# Altium PCB led_7seg_big.PcbDoc (part 1 of 2)
Units mm, origin at the board's own origin, x right, y up, seen from the top; angles counter-clockwise.
Board outline 221 x 297 mm, 2 copper layers (Top Layer, Bottom Layer); 205 components, 177 nets, 962 pads, 294 vias.
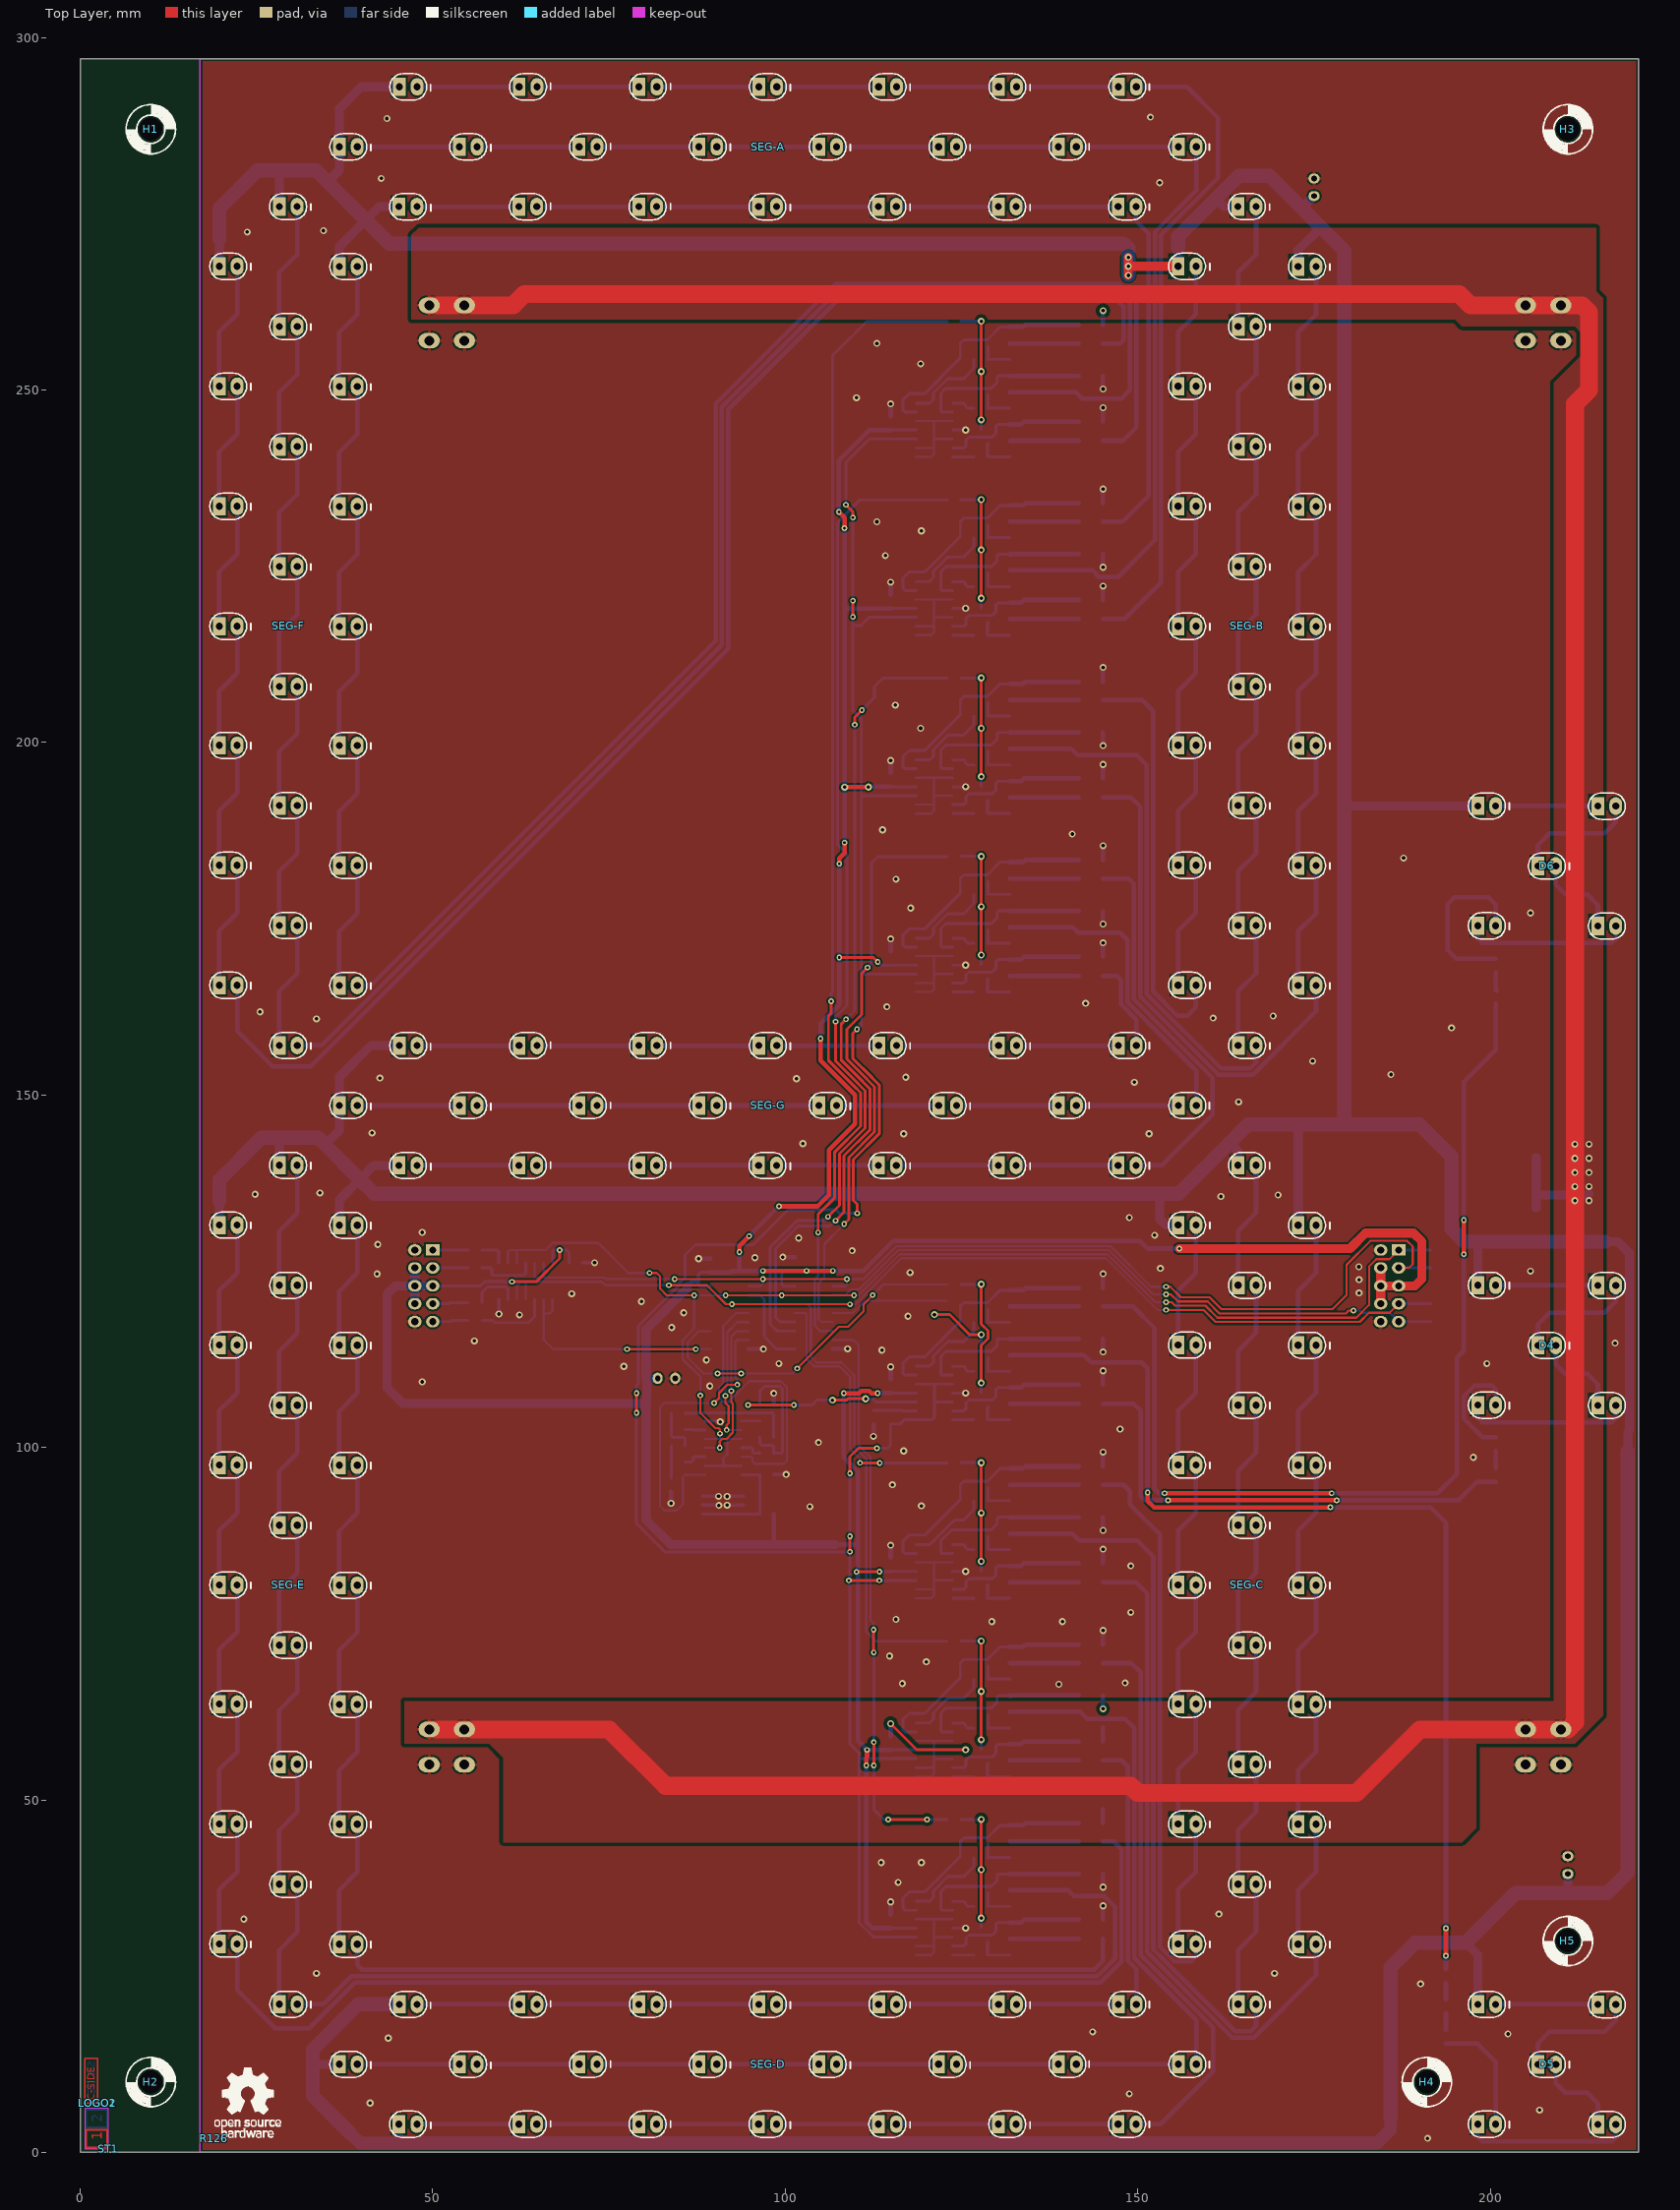
[diagram p0: Top Layer view]
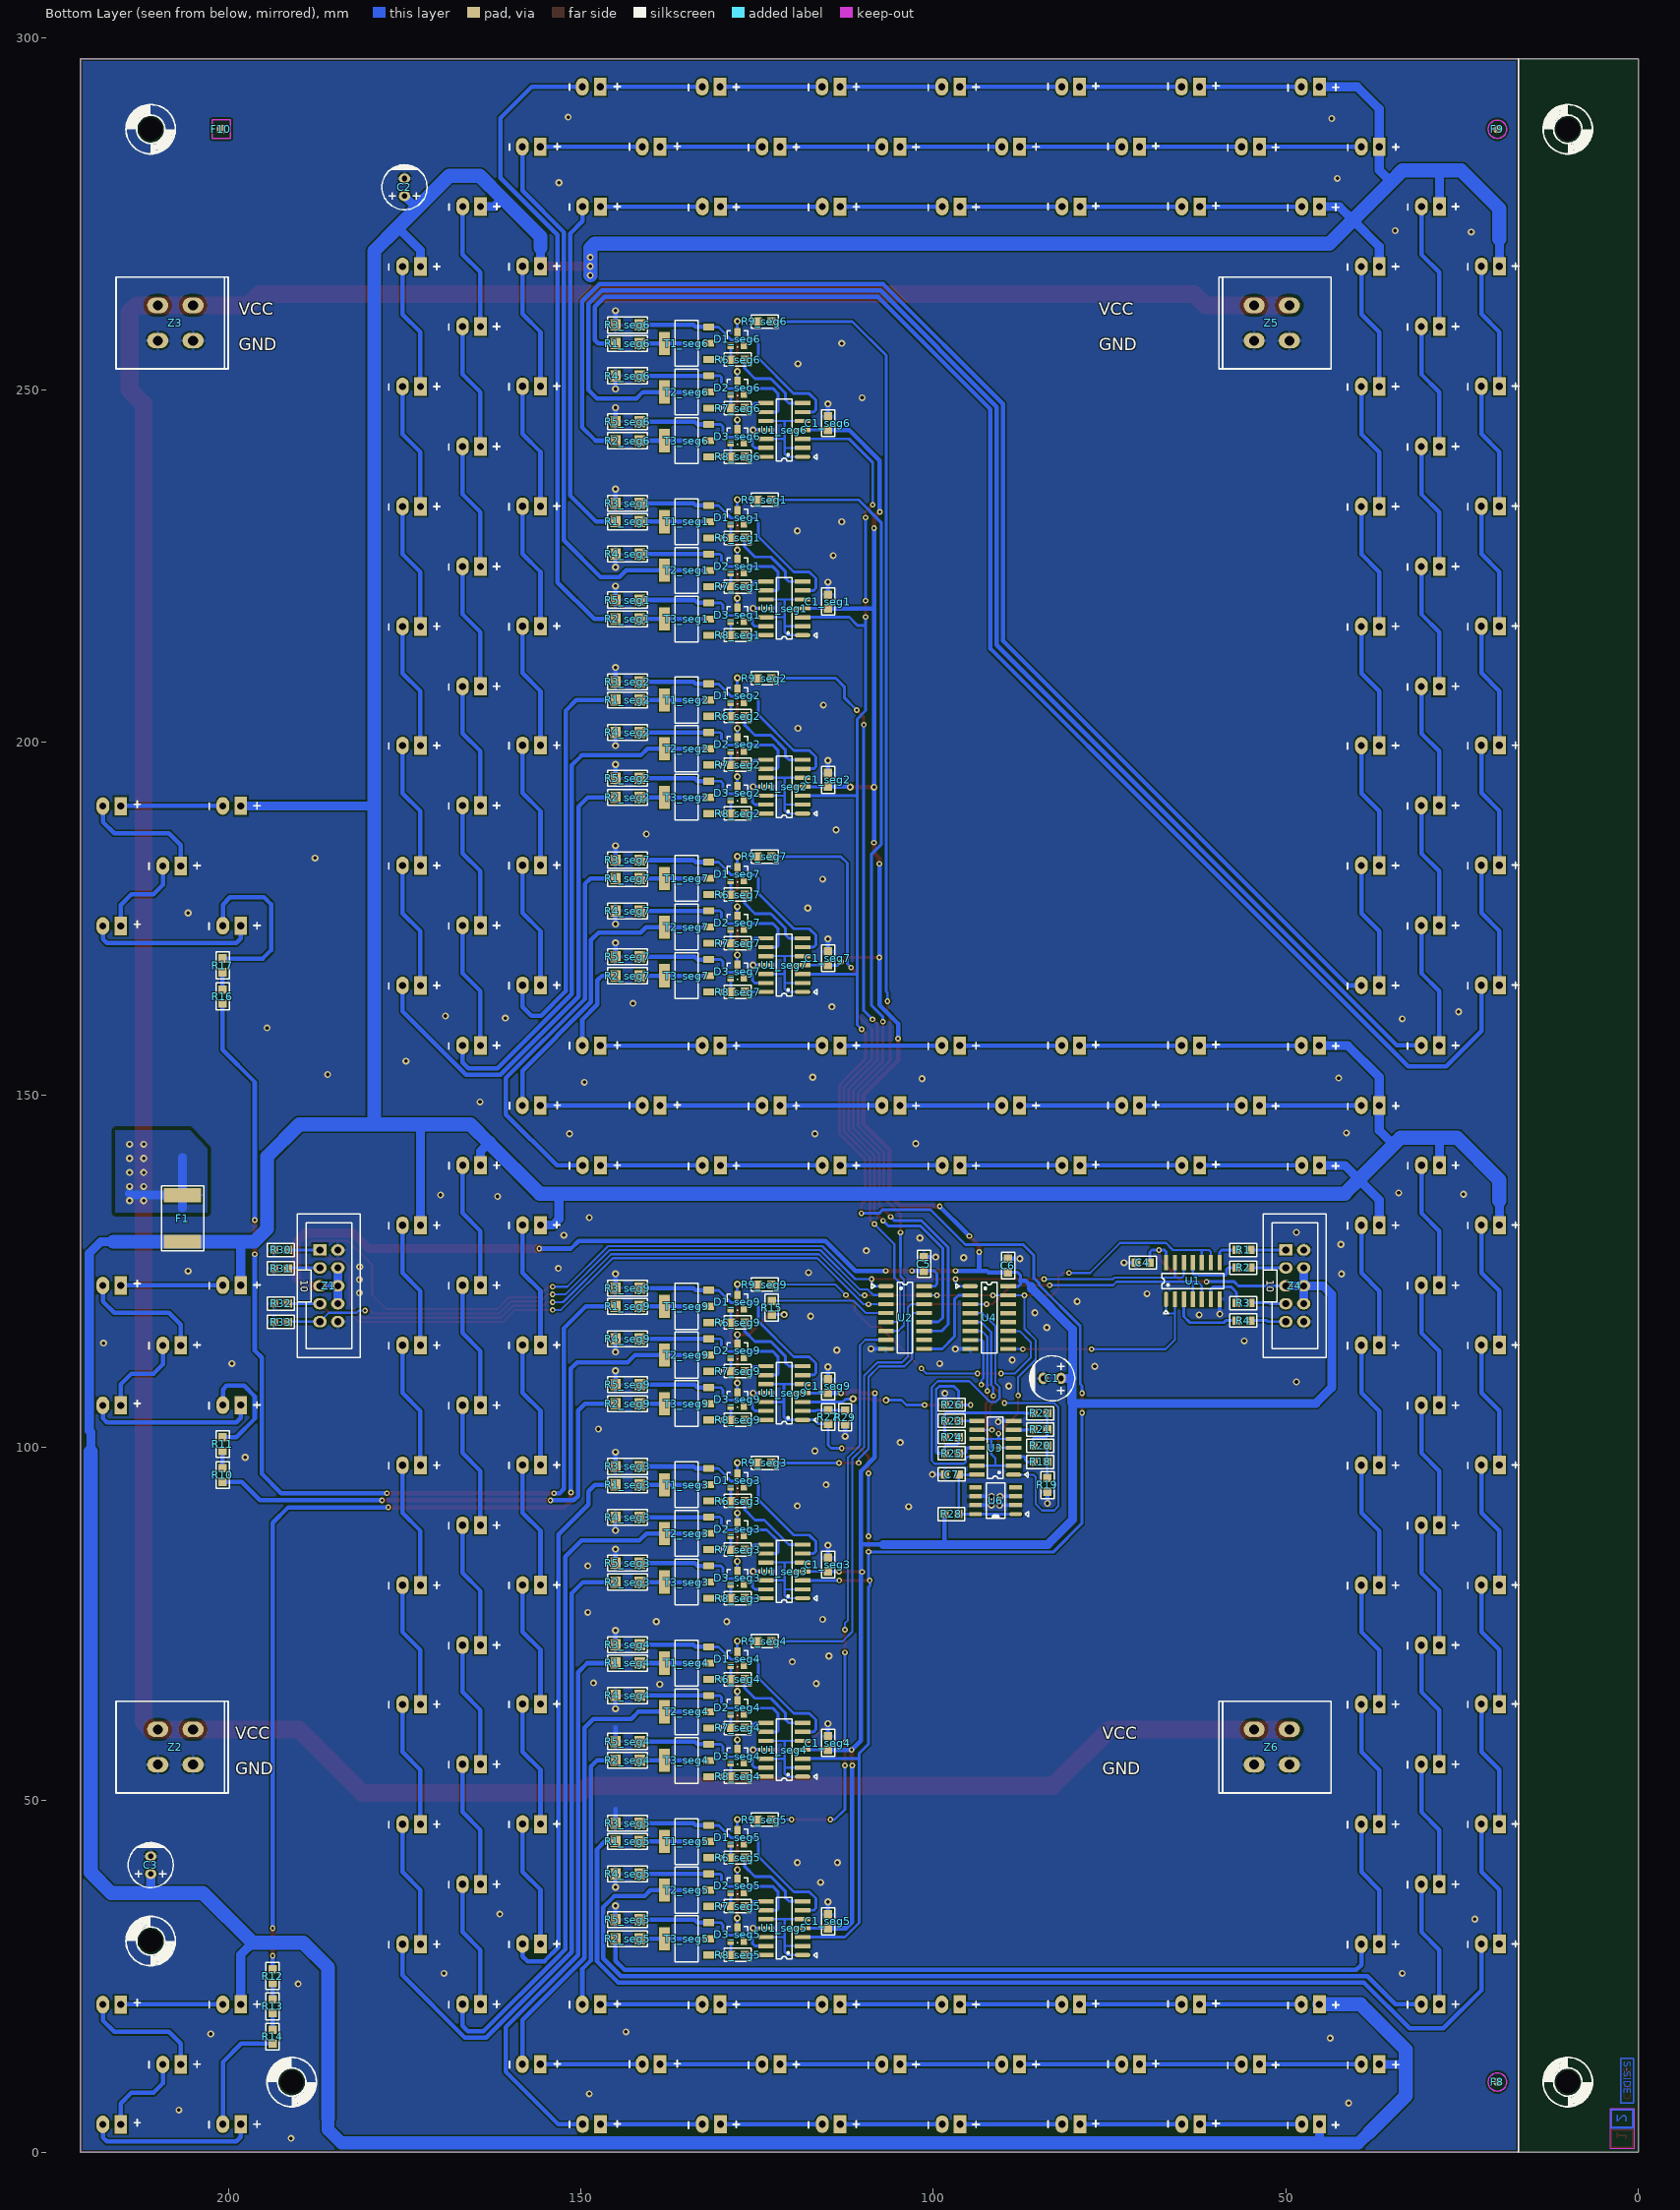
[diagram p1: Bottom Layer view, seen from below]

## Layer stack, top to bottom
Top Solder: solder mask 0.0102, Solder Resist, Dk 3.5
Top Layer: signal copper 0.0356
Dielectric1: dielectric 0.32, FR-4, Dk 4.8
Bottom Layer: signal copper 0.0356
Bottom Solder: solder mask 0.0102, Solder Resist, Dk 3.5

## Board outline
0,0 0,297 221,297 221,0

## Design rules (kind name [scope] priority, off if disabled: settings)
Clearance Clearance_ST1 [InComponent('ST1') vs InComponent('ST1')] p1: gap=0 ignorepadtopadclearanceinfootprint=FALSE
Clearance Clearance_1 [InNet('VLED')] p2: gap=0.5 ignorepadtopadclearanceinfootprint=FALSE except(0: Arc-Hole Track-Hole SMDPad-Hole THPad-Hole Via-Hole Fill-Hole Poly-Hole Region-Hole Text-Hole)
Clearance [All] p3: gap=0.254 ignorepadtopadclearanceinfootprint=FALSE except(0: Arc-Hole Track-Hole SMDPad-Hole THPad-Hole Via-Hole Fill-Hole Poly-Hole Region-Hole Text-Hole)
FabricationTestPointUsage TestPointUsage [All] p1: valid=0 allowmultiple=FALSE
FabricationTestpoint Testpoint [All] p1: side=3 testpointundercomponent=TRUE minsize=1.016 maxsize=2.54 preferedsize=1.524 minholesize=0 maxholesize=1.016 preferedholesize=0.813 testpointgrid=0.025 allowsidetop=TRUE allowsidebottom=TRUE usegrid=TRUE gridtolerance=0
HoleSize [All] p1: absolutevalues=TRUE maxlimit=5 minlimit=0.3 maxpercent=80.000 minpercent=20.000
MinimumAnnularRing [All] p1: minimumring=0.004
MinimumSolderMaskSliver [All] p1: minsoldermaskwidth=0.1
PlaneConnect [All] p1: planeconnectstyle=Relief reliefexpansion=0.508 reliefentries=4 reliefconductorwidth=0.305 reliefairgap=0.254
PolygonConnect [(InPadClass('All Pads'))] p1: connectstyle=Relief reliefconductorwidth=0.508 reliefentries=4 polygonreliefangle="90 Angle" airgapwidth=0.254
PolygonConnect PolygonConnect1 [All] p2: connectstyle=Direct reliefconductorwidth=0.406 reliefentries=4 polygonreliefangle="90 Angle" airgapwidth=0.254
RoomDefinition seg9 [InComponentClass('seg9')] p1: confinementstyle=ConfineIn formatcopy=TRUE lockcomponents=FALSE outline 146.911,125.5 113.723,125.5 113.723,100.2 146.911,100.2
RoomDefinition seg1 [InComponentClass('seg1')] p2: confinementstyle=ConfineIn formatcopy=TRUE lockcomponents=FALSE outline 146.911,236.809 113.723,236.809 113.723,211.509 146.911,211.509
RoomDefinition seg7 [InComponentClass('seg7')] p3: confinementstyle=ConfineIn formatcopy=TRUE lockcomponents=FALSE outline 146.911,186.209 113.723,186.209 113.723,160.909 146.911,160.909
RoomDefinition seg6 [InComponentClass('seg6')] p4: confinementstyle=ConfineIn formatcopy=TRUE lockcomponents=FALSE outline 146.911,262.109 113.723,262.109 113.723,236.809 146.911,236.809
RoomDefinition seg5 [InComponentClass('seg5')] p5: confinementstyle=ConfineIn formatcopy=TRUE lockcomponents=FALSE outline 146.911,49.6 113.723,49.6 113.723,24.3 146.911,24.3
RoomDefinition seg4 [InComponentClass('seg4')] p6: confinementstyle=ConfineIn formatcopy=TRUE lockcomponents=FALSE outline 146.911,74.9 113.723,74.9 113.723,49.6 146.911,49.6
RoomDefinition seg3 [InComponentClass('seg3')] p7: confinementstyle=ConfineIn formatcopy=TRUE lockcomponents=FALSE outline 146.911,100.2 113.723,100.2 113.723,74.9 146.911,74.9
RoomDefinition seg2 [InComponentClass('seg2')] p8: confinementstyle=ConfineIn formatcopy=TRUE lockcomponents=FALSE outline 146.911,211.509 113.723,211.509 113.723,186.209 146.911,186.209
RoutingVias [All] p1: holewidth=0.5 width=1 viastyle="Through Hole" minholewidth=0.4 minwidth=0.8 maxholewidth=2 maxwidth=2
SilkToSolderMaskClearance SilkscreenOverComponentPads [IsPad] p1: minsilkscreentomaskgap=0.254 clearancetoexposedcopper=TRUE
SolderMaskExpansion SolderMaskExpansion_VIA [(IsVia)] p1: expansion=-10
SolderMaskExpansion [All] p2: expansion=0.05
Width [All] p1: maxlimit=2.54 minlimit=0.203 preferedwidth=0.254 minimp=50.000000 maximp=50.000000 favimp=50.000000
24 further rules are at their usual default settings.

## Classes and differential pairs
net class EN_SEG_DP[1..2]: EN_SEG_DP1 EN_SEG_DP2
net class EN_SEG_[1..7]: EN_SEG_1 EN_SEG_2 EN_SEG_3 EN_SEG_4 EN_SEG_5 EN_SEG_6 EN_SEG_7
net class DIM[0..3]: DIM0 DIM1 DIM2 DIM3
component class seg7: C1_seg7 D1_seg7 D2_seg7 D3_seg7 R1_seg7 R2_seg7 R3_seg7 R4_seg7 R5_seg7 R6_seg7 R7_seg7 R8_seg7 R9_seg7 T1_seg7 T2_seg7 T3_seg7 U1_seg7
component class seg1: C1_seg1 D1_seg1 D2_seg1 D3_seg1 R1_seg1 R2_seg1 R3_seg1 R4_seg1 R5_seg1 R6_seg1 R7_seg1 R8_seg1 R9_seg1 T1_seg1 T2_seg1 T3_seg1 U1_seg1
component class seg9: C1_seg9 D1_seg9 D2_seg9 D3_seg9 R1_seg9 R2_seg9 R3_seg9 R4_seg9 R5_seg9 R6_seg9 R7_seg9 R8_seg9 R9_seg9 T1_seg9 T2_seg9 T3_seg9 U1_seg9
channel class Row: Row1 Row2 Row3 Row4 Row5 Row6 Row7 Row8
component class seg2: C1_seg2 D1_seg2 D2_seg2 D3_seg2 R1_seg2 R2_seg2 R3_seg2 R4_seg2 R5_seg2 R6_seg2 R7_seg2 R8_seg2 R9_seg2 T1_seg2 T2_seg2 T3_seg2 U1_seg2
component class seg3: C1_seg3 D1_seg3 D2_seg3 D3_seg3 R1_seg3 R2_seg3 R3_seg3 R4_seg3 R5_seg3 R6_seg3 R7_seg3 R8_seg3 R9_seg3 T1_seg3 T2_seg3 T3_seg3 U1_seg3
component class seg4: C1_seg4 D1_seg4 D2_seg4 D3_seg4 R1_seg4 R2_seg4 R3_seg4 R4_seg4 R5_seg4 R6_seg4 R7_seg4 R8_seg4 R9_seg4 T1_seg4 T2_seg4 T3_seg4 U1_seg4
component class seg5: C1_seg5 D1_seg5 D2_seg5 D3_seg5 R1_seg5 R2_seg5 R3_seg5 R4_seg5 R5_seg5 R6_seg5 R7_seg5 R8_seg5 R9_seg5 T1_seg5 T2_seg5 T3_seg5 U1_seg5
component class seg6: C1_seg6 D1_seg6 D2_seg6 D3_seg6 R1_seg6 R2_seg6 R3_seg6 R4_seg6 R5_seg6 R6_seg6 R7_seg6 R8_seg6 R9_seg6 T1_seg6 T2_seg6 T3_seg6 U1_seg6

## Components (designator, comment, footprint, x,y, rotation, side; value= is the part's Value field where it differs from the comment)
C1 "47u/35V" CAP_V_6.3X11 84.4,109.8 r180 bottom
C1_seg1 "100n/50V" 0805 114.947,219.009 r90 bottom (schematic designator C1)
C1_seg2 "100n/50V" 0805 114.947,193.709 r90 bottom (schematic designator C1)
C1_seg3 "100n/50V" 0805 114.947,82.4 r90 bottom (schematic designator C1)
C1_seg4 "100n/50V" 0805 114.947,57.1 r90 bottom (schematic designator C1)
C1_seg5 "100n/50V" 0805 114.947,31.8 r90 bottom (schematic designator C1)
C1_seg6 "100n/50V" 0805 114.947,244.309 r90 bottom (schematic designator C1)
C1_seg7 "100n/50V" 0805 114.947,168.409 r90 bottom (schematic designator C1)
C1_seg9 "100n/50V" 0805 114.947,107.7 r90 bottom (schematic designator C1)
C2 "47u/35V" CAP_V_6.3X11 175,280 r270 bottom
C3 "47u/35V" CAP_V_6.3X11 211,42 r270 bottom
C4 "100n/50V" 0805 69.3,126.2 r0 bottom
C5 "100n/50V" 0805 101.351,125.043 r90 bottom
C6 "100n/50V" 0805 89.401,124.826 r90 bottom
C7 "100n/50V" 0805 96.409,96.145 r0 bottom
D1_seg1 "BAR43" SOT-23 128.747,230.909 r270 bottom (schematic designator D1)
D1_seg2 "BAR43" SOT-23 128.747,205.609 r270 bottom (schematic designator D1)
D1_seg3 "BAR43" SOT-23 128.747,94.3 r270 bottom (schematic designator D1)
D1_seg4 "BAR43" SOT-23 128.747,69 r270 bottom (schematic designator D1)
D1_seg5 "BAR43" SOT-23 128.747,43.7 r270 bottom (schematic designator D1)
D1_seg6 "BAR43" SOT-23 128.747,256.209 r270 bottom (schematic designator D1)
D1_seg7 "BAR43" SOT-23 128.747,180.309 r270 bottom (schematic designator D1)
D1_seg9 "BAR43" SOT-23 128.747,119.6 r270 bottom (schematic designator D1)
D2_seg1 "BAR43" SOT-23 128.747,224.009 r270 bottom (schematic designator D2)
D2_seg2 "BAR43" SOT-23 128.747,198.709 r270 bottom (schematic designator D2)
D2_seg3 "BAR43" SOT-23 128.747,87.4 r270 bottom (schematic designator D2)
D2_seg4 "BAR43" SOT-23 128.747,62.1 r270 bottom (schematic designator D2)
D2_seg5 "BAR43" SOT-23 128.747,36.8 r270 bottom (schematic designator D2)
D2_seg6 "BAR43" SOT-23 128.747,249.309 r270 bottom (schematic designator D2)
D2_seg7 "BAR43" SOT-23 128.747,173.409 r270 bottom (schematic designator D2)
D2_seg9 "BAR43" SOT-23 128.747,112.7 r270 bottom (schematic designator D2)
D3_seg1 "BAR43" SOT-23 128.747,217.109 r270 bottom (schematic designator D3)
D3_seg2 "BAR43" SOT-23 128.747,191.809 r270 bottom (schematic designator D3)
D3_seg3 "BAR43" SOT-23 128.747,80.5 r270 bottom (schematic designator D3)
D3_seg4 "BAR43" SOT-23 128.747,55.2 r270 bottom (schematic designator D3)
D3_seg5 "BAR43" SOT-23 128.747,29.9 r270 bottom (schematic designator D3)
D3_seg6 "BAR43" SOT-23 128.747,242.409 r270 bottom (schematic designator D3)
D3_seg7 "BAR43" SOT-23 128.747,166.509 r270 bottom (schematic designator D3)
D3_seg9 "BAR43" SOT-23 128.747,105.8 r270 bottom (schematic designator D3)
D4 "SEGMENT_5LED" SEGMENT_5LED_V 197,103.5 r0 top locked
D5 "SEGMENT_5LED" SEGMENT_5LED_V 197,1.5 r0 top locked
D6 "SEGMENT_5LED" SEGMENT_5LED_V 197,171.5 r0 top locked
F1 "SL050-60" 2920 206.5,129.184 r90 bottom
F8 "FID-S-RD-1.2-3.0" FID-S-RD-1.2-3.0 20,10 r270 bottom
F9 "FID-S-RD-1.2-3.0" FID-S-RD-1.2-3.0 20,287 r270 bottom
F10 "FID-S-RC-1.2-3.0" FID-S-RC-1.2-3.0 201,287 r270 bottom
H1 "MH_3.3-2L" MH_3.3-2L 10,287 r0 top locked
H2 "MH_3.3-2L" MH_3.3-2L 10,10 r0 top locked
H3 "MH_3.3-2L" MH_3.3-2L 211,287 r0 top locked
H4 "MH_3.3-2L" MH_3.3-2L 191,10 r0 top locked
H5 "MH_3.3-2L" MH_3.3-2L 211,30 r0 top locked
LOGO1 "C-SIDE" COMPONENT_SIDE 2.5,7 r90 top
LOGO2 "S-SIDE" SOLDER_SIDE 2.5,7 r90 top
R1 "100R" 0805 57,128 r180 bottom
R1_seg1 "100R" 1206 141.647,231.309 r0 bottom (schematic designator R1)
R1_seg2 "100R" 1206 141.647,206.009 r0 bottom (schematic designator R1)
R1_seg3 "100R" 1206 141.647,94.7 r0 bottom (schematic designator R1)
R1_seg4 "100R" 1206 141.647,69.4 r0 bottom (schematic designator R1)
R1_seg5 "100R" 1206 141.647,44.1 r0 bottom (schematic designator R1)
R1_seg6 "100R" 1206 141.647,256.609 r0 bottom (schematic designator R1)
R1_seg7 "100R" 1206 141.647,180.709 r0 bottom (schematic designator R1)
R1_seg9 "100R" 1206 141.647,120 r0 bottom (schematic designator R1)
R2 "100R" 0805 57,125.5 r180 bottom
R2_seg1 "100R" 1206 141.647,217.509 r0 bottom (schematic designator R2)
R2_seg2 "100R" 1206 141.647,192.209 r0 bottom (schematic designator R2)
R2_seg3 "100R" 1206 141.647,80.9 r0 bottom (schematic designator R2)
R2_seg4 "100R" 1206 141.647,55.6 r0 bottom (schematic designator R2)
R2_seg5 "100R" 1206 141.647,30.3 r0 bottom (schematic designator R2)
R2_seg6 "100R" 1206 141.647,242.809 r0 bottom (schematic designator R2)
R2_seg7 "100R" 1206 141.647,166.909 r0 bottom (schematic designator R2)
R2_seg9 "100R" 1206 141.647,106.2 r0 bottom (schematic designator R2)
R3 "100R" 0805 57,120.5 r180 bottom
R3_seg1 "100R" 1206 141.647,233.909 r0 bottom (schematic designator R3)
R3_seg2 "100R" 1206 141.647,208.609 r0 bottom (schematic designator R3)
R3_seg3 "100R" 1206 141.647,97.3 r0 bottom (schematic designator R3)
R3_seg4 "100R" 1206 141.647,72 r0 bottom (schematic designator R3)
R3_seg5 "100R" 1206 141.647,46.7 r0 bottom (schematic designator R3)
R3_seg6 "100R" 1206 141.647,259.209 r0 bottom (schematic designator R3)
R3_seg7 "100R" 1206 141.647,183.309 r0 bottom (schematic designator R3)
R3_seg9 "100R" 1206 141.647,122.6 r0 bottom (schematic designator R3)
R4 "100R" 0805 57,118 r180 bottom
R4_seg1 "100R" 1206 141.647,226.709 r0 bottom (schematic designator R4)
R4_seg2 "100R" 1206 141.647,201.409 r0 bottom (schematic designator R4)
R4_seg3 "100R" 1206 141.647,90.1 r0 bottom (schematic designator R4)
R4_seg4 "100R" 1206 141.647,64.8 r0 bottom (schematic designator R4)
R4_seg5 "100R" 1206 141.647,39.5 r0 bottom (schematic designator R4)
R4_seg6 "100R" 1206 141.647,252.009 r0 bottom (schematic designator R4)
R4_seg7 "100R" 1206 141.647,176.109 r0 bottom (schematic designator R4)
R4_seg9 "100R" 1206 141.647,115.4 r0 bottom (schematic designator R4)
R5_seg1 "100R" 1206 141.647,220.209 r0 bottom (schematic designator R5)
R5_seg2 "100R" 1206 141.647,194.909 r0 bottom (schematic designator R5)
R5_seg3 "100R" 1206 141.647,83.6 r0 bottom (schematic designator R5)
R5_seg4 "100R" 1206 141.647,58.3 r0 bottom (schematic designator R5)
R5_seg5 "100R" 1206 141.647,33 r0 bottom (schematic designator R5)
R5_seg6 "100R" 1206 141.647,245.509 r0 bottom (schematic designator R5)
R5_seg7 "100R" 1206 141.647,169.609 r0 bottom (schematic designator R5)
R5_seg9 "100R" 1206 141.647,108.9 r0 bottom (schematic designator R5)
R6_seg1 "10k" 0805 126.747,229.009 r0 bottom (schematic designator R6)
R6_seg2 "10k" 0805 126.747,203.709 r0 bottom (schematic designator R6)
R6_seg3 "10k" 0805 126.747,92.4 r0 bottom (schematic designator R6)
R6_seg4 "10k" 0805 126.747,67.1 r0 bottom (schematic designator R6)
R6_seg5 "10k" 0805 126.747,41.8 r0 bottom (schematic designator R6)
R6_seg6 "10k" 0805 126.747,254.309 r0 bottom (schematic designator R6)
R6_seg7 "10k" 0805 126.747,178.409 r0 bottom (schematic designator R6)
R6_seg9 "10k" 0805 126.747,117.7 r0 bottom (schematic designator R6)
R7_seg1 "10k" 0805 126.747,222.109 r0 bottom (schematic designator R7)
R7_seg2 "10k" 0805 126.747,196.809 r0 bottom (schematic designator R7)
R7_seg3 "10k" 0805 126.747,85.5 r0 bottom (schematic designator R7)
R7_seg4 "10k" 0805 126.747,60.2 r0 bottom (schematic designator R7)
R7_seg5 "10k" 0805 126.747,34.9 r0 bottom (schematic designator R7)
R7_seg6 "10k" 0805 126.747,247.409 r0 bottom (schematic designator R7)
R7_seg7 "10k" 0805 126.747,171.509 r0 bottom (schematic designator R7)
R7_seg9 "10k" 0805 126.747,110.8 r0 bottom (schematic designator R7)
R8_seg1 "10k" 0805 126.747,215.209 r0 bottom (schematic designator R8)
R8_seg2 "10k" 0805 126.747,189.909 r0 bottom (schematic designator R8)
R8_seg3 "10k" 0805 126.747,78.6 r0 bottom (schematic designator R8)
R8_seg4 "10k" 0805 126.747,53.3 r0 bottom (schematic designator R8)
R8_seg5 "10k" 0805 126.747,28 r0 bottom (schematic designator R8)
R8_seg6 "10k" 0805 126.747,240.509 r0 bottom (schematic designator R8)
R8_seg7 "10k" 0805 126.747,164.609 r0 bottom (schematic designator R8)
R8_seg9 "10k" 0805 126.747,103.9 r0 bottom (schematic designator R8)
R9_seg1 "1k" 0805 122.947,234.409 r0 bottom (schematic designator R9)
R9_seg2 "1k" 0805 122.947,209.109 r0 bottom (schematic designator R9)
R9_seg3 "1k" 0805 122.947,97.8 r0 bottom (schematic designator R9)
R9_seg4 "1k" 0805 122.947,72.5 r0 bottom (schematic designator R9)
R9_seg5 "1k" 0805 122.947,47.2 r0 bottom (schematic designator R9)
R9_seg6 "1k" 0805 122.947,259.709 r0 bottom (schematic designator R9)
R9_seg7 "1k" 0805 122.947,183.809 r0 bottom (schematic designator R9)
R9_seg9 "1k" 0805 122.947,123.1 r0 bottom (schematic designator R9)
R10 "100R" 0805 200.8,95.1 r90 bottom
R11 "100R" 0805 200.8,99.5 r90 bottom
R12 "100R" 0805 193.7,26 r270 bottom
R13 "100R" 0805 193.7,21.7 r270 bottom
R14 "100R" 0805 193.7,17.4 r270 bottom
R15 "1k" 0805 122.917,120.786 r270 bottom
R16 "100R" 0805 200.8,163 r90 bottom
R17 "100R" 0805 200.8,167.4 r90 bottom
R18 "2k" 0805 85.809,97.945 r180 bottom
R19 "2k" 0805 83.809,95.645 r270 bottom
R20 "1k" 0805 85.809,100.245 r180 bottom
R21 "2k" 0805 85.809,102.545 r180 bottom
R22 "1k" 0805 85.809,104.845 r180 bottom
R23 "2k" 0805 96.409,103.745 r0 bottom
R24 "1k" 0805 96.409,101.445 r0 bottom
R25 "2k" 0805 96.409,99.145 r0 bottom
R26 "2k" 0805 96.409,106.045 r0 bottom
R27 "1k" 0805 114.917,105.286 r270 bottom
R28 "1k" 0805 98.409,90.545 r180 bottom
R29 "10k" 0805 112.517,103.286 r90 bottom
R30 "1k" 0805 193.5,128 r180 bottom
R31 "1k" 0805 193.5,125.4 r180 bottom
R32 "1k" 0805 193.5,120.4 r180 bottom
R33 "1k" 0805 193.5,117.8 r180 bottom
R126 "Comment" PCB_OSHW_LOGO_1000 19,2 r0 top
SEG-A "SEGMENT_22LED" SEGMENT_22LED_H 35,284.5 r0 top locked
SEG-B "SEGMENT_22LED" SEGMENT_22LED_V 165.5,154 r0 top locked
SEG-C "SEGMENT_22LED" SEGMENT_22LED_V 165.5,18 r0 top locked
SEG-D "SEGMENT_22LED" SEGMENT_22LED_H 35,12.5 r0 top locked
SEG-E "SEGMENT_22LED" SEGMENT_22LED_V 29.5,18 r0 top locked
SEG-F "SEGMENT_22LED" SEGMENT_22LED_V 29.5,154 r0 top locked
SEG-G "SEGMENT_22LED" SEGMENT_22LED_H 35,148.5 r0 top locked
ST1 "STACKUP_2LAYER" STACKUP_2LAYER 4,0.5 r90 top
T1_seg1 "BCP56-16" SOT223 131.847,229.009 r180 bottom (schematic designator T1)
T1_seg2 "BCP56-16" SOT223 131.847,203.709 r180 bottom (schematic designator T1)
T1_seg3 "BCP56-16" SOT223 131.847,92.4 r180 bottom (schematic designator T1)
T1_seg4 "BCP56-16" SOT223 131.847,67.1 r180 bottom (schematic designator T1)
T1_seg5 "BCP56-16" SOT223 131.847,41.8 r180 bottom (schematic designator T1)
T1_seg6 "BCP56-16" SOT223 131.847,254.309 r180 bottom (schematic designator T1)
T1_seg7 "BCP56-16" SOT223 131.847,178.409 r180 bottom (schematic designator T1)
T1_seg9 "BCP56-16" SOT223 131.847,117.7 r180 bottom (schematic designator T1)
T2_seg1 "BCP56-16" SOT223 131.847,222.109 r180 bottom (schematic designator T2)
T2_seg2 "BCP56-16" SOT223 131.847,196.809 r180 bottom (schematic designator T2)
T2_seg3 "BCP56-16" SOT223 131.847,85.5 r180 bottom (schematic designator T2)
T2_seg4 "BCP56-16" SOT223 131.847,60.2 r180 bottom (schematic designator T2)
T2_seg5 "BCP56-16" SOT223 131.847,34.9 r180 bottom (schematic designator T2)
T2_seg6 "BCP56-16" SOT223 131.847,247.409 r180 bottom (schematic designator T2)
T2_seg7 "BCP56-16" SOT223 131.847,171.509 r180 bottom (schematic designator T2)
T2_seg9 "BCP56-16" SOT223 131.847,110.8 r180 bottom (schematic designator T2)
T3_seg1 "BCP56-16" SOT223 131.847,215.209 r180 bottom (schematic designator T3)
T3_seg2 "BCP56-16" SOT223 131.847,189.909 r180 bottom (schematic designator T3)
T3_seg3 "BCP56-16" SOT223 131.847,78.6 r180 bottom (schematic designator T3)
T3_seg4 "BCP56-16" SOT223 131.847,53.3 r180 bottom (schematic designator T3)
T3_seg5 "BCP56-16" SOT223 131.847,28 r180 bottom (schematic designator T3)
T3_seg6 "BCP56-16" SOT223 131.847,240.509 r180 bottom (schematic designator T3)
T3_seg7 "BCP56-16" SOT223 131.847,164.609 r180 bottom (schematic designator T3)
T3_seg9 "BCP56-16" SOT223 131.847,103.9 r180 bottom (schematic designator T3)
U1 "74LVC08AD" SO14 67,121 r180 bottom
U1_seg1 "LM324D" SO14 118.547,215.209 r90 bottom (schematic designator U1)
U1_seg2 "LM324D" SO14 118.547,189.909 r90 bottom (schematic designator U1)
U1_seg3 "LM324D" SO14 118.547,78.6 r90 bottom (schematic designator U1)
U1_seg4 "LM324D" SO14 118.547,53.3 r90 bottom (schematic designator U1)
U1_seg5 "LM324D" SO14 118.547,28 r90 bottom (schematic designator U1)
U1_seg6 "LM324D" SO14 118.547,240.509 r90 bottom (schematic designator U1)
U1_seg7 "LM324D" SO14 118.547,164.609 r90 bottom (schematic designator U1)
U1_seg9 "LM324D" SO14 118.547,103.9 r90 bottom (schematic designator U1)
U2 "74HC4094-SMD" SO16N 106.72,122.87 r270 bottom
U3 "74LVC08AD" SO14 88.611,96.132 r90 bottom
U4 "74HC4094-SMD" SO16N 94.771,122.854 r270 bottom
U6 "TL431CD" SO8 88.309,90.545 r90 bottom
Z1 "AWP-10P" BH10S 187,128 r270 bottom
Z2 "DG390-5.0-02P-12-00A(H)" WAGO2X2-5 210,60 r270 bottom
Z3 "DG390-5.0-02P-12-00A(H)" WAGO2X2-5 210,262 r270 bottom
Z4 "AWP-10P" BH10S 50,128 r270 bottom
Z5 "DG390-5.0-02P-12-00A(H)" WAGO2X2-5 49.5,257 r90 bottom
Z6 "DG390-5.0-02P-12-00A(H)" WAGO2X2-5 49.5,55 r90 bottom

## Footprints (in the part's own frame and the unit in brackets; to place one, negate y for a bottom-side part, rotate by r counter-clockwise, add the part's x,y. Pads: shape width x height; smd on the part's side, far side on the other; paste and mask are expansions set on the pad)
0805 [mm]
  rect 1.2x1.2 smd: 1(0,0) 2(1.95,0)
  silkscreen extent -0.93,-0.95 2.89,0.93
1206 [mm]
  rect 1.52x1.6 smd: 1(0,0) 2(3.43,0)
  silkscreen extent -1.09,-1.13 4.52,1.13
2920 [mm]
  rect 2x5.3 smd: 1(0,0) 2(6.6,0)
  silkscreen extent -1.3,-3 7.9,3
BH10S [mm]
  rect 1.6x1.9 hole 1: 1(0,0)
  oval 1.6x1.9 hole 1: 2(0,2.54) 3(2.54,0) 4(2.54,2.54) 5(5.08,0) 6(5.08,2.54) 7(7.62,0) 8(7.62,2.54) 9(10.16,0) 10(10.16,2.54)
  silkscreen extent -5.09,-3.19 15.26,5.72
CAP_V_6.3X11 [mm]
  oval 1.4x1.6 hole 0.8: 1(0,0) 2(2.5,0)
  silkscreen extent -1.95,-3.2 4.45,3.2
COMPONENT_SIDE [mm]
  Top Layer lines w0.203: 0,1.829 6.325,1.829 6.325,0 0,0 0,1.829
FID-S-RC-1.2-3.0 [mm]
  rect 1.2x1.2 smd paste-10 mask+0: 0(0,0)
  Top Layer keep-out lines w0.2: 1.3,1.3 1.3,-1.3 -1.3,-1.3 -1.3,1.3 1.3,1.3
FID-S-RD-1.2-3.0 [mm]
  round 1.2 smd paste-10 mask+0: 0(0,0)
  Top Layer keep-out lines w0.2: 0.016,1.3 ccw(c0.016,0) 0.016,-1.3 ccw(c0.016,0) 0.016,1.3
MH_3.3-2L [mm]
  round 0 hole 3.3 unplated: 0(0,0)
  silkscreen extent -3.49,-3.52 3.51,3.48
PCB_OSHW_LOGO_1000 [mm]
  silkscreen extent 0.04,0.08 9.48,10
SEGMENT_5LED_V [mm]
  rect 1.8x2.6 hole 1: A1(1.23,19.5) ""(1.23,2.5) ""(9.746,10.976) ""(18.255,2.467) ""(18.255,19.467)
  oval 1.8x2.5 hole 1: K1(3.77,2.5) ""(3.77,19.5) ""(12.286,10.976) ""(20.795,2.467) ""(20.795,19.467)
  Bottom Layer lines w0.635: 1.23,2.5 1.23,0.67 1.857,0.043 20.209,0.043 20.795,0.629 20.795,2.467 ; 3.77,19.5 18.255,19.5 ; 9.746,10.976 9.746,13.946 11.4,15.6 19.184,15.6 20.795,17.211 20.795,19.467 ; 12.286,10.976 12.286,8.266 13.609,6.943 16.757,6.943 18.255,5.445 18.255,2.467
  silkscreen extent -0.11,0.6 22.13,21.35, body extent 0.4,0.87 21.63,21.1, height 7.3
SEGMENT_22LED_H [mm]
  rect 1.8x2.6 hole 1: A(18.75,0) A(27.21,-8.5) A(27.25,8.5) A(35.75,0) A(44.21,-8.5) A(44.25,8.5) A(52.75,0) A(61.21,-8.5) A(61.25,8.5) A(69.75,0) A(78.21,-8.5) A(78.25,8.5) A(86.75,0) A(95.21,-8.5) A(95.25,8.5) A(103.75,0) A(112.21,-8.5) A(112.25,8.5) A(120.75,0) A1(10.21,-8.5) A2(1.75,0) A3(10.25,8.5)
  oval 1.8x2.5 hole 1: K(4.29,0) K(12.75,-8.5) K(12.79,8.5) K(21.29,0) K(29.75,-8.5) K(29.79,8.5) K(38.29,0) K(46.75,-8.5) K(46.79,8.5) K(55.29,0) K(63.75,-8.5) K(63.79,8.5) K(72.29,0) K(80.75,-8.5) K(80.79,8.5) K(89.29,0) K(97.75,-8.5) K(97.79,8.5) K(106.29,0) K1(114.79,8.5) K2(123.29,0) K3(114.75,-8.5)
  Bottom Layer lines w0.635: 4.29,0 18.75,0 ; 12.75,-8.5 27.21,-8.5 ; 12.79,8.5 27.25,8.5 ; 21.29,0 35.75,0 ; 29.75,-8.5 44.21,-8.5 ; 29.79,8.5 44.25,8.5 ; 38.29,0 52.75,0 ; 46.75,-8.5 61.21,-8.5 ; 46.79,8.5 61.25,8.5 ; 55.29,0 69.75,0 ; 63.75,-8.5 78.21,-8.5 ; 63.79,8.5 78.25,8.5 ; 72.29,0 86.75,0 ; 80.75,-8.5 95.21,-8.5 ; 80.79,8.5 95.25,8.5 ; 89.29,0 103.75,0 ; 97.75,-8.5 112.21,-8.5 ; 97.79,8.5 112.25,8.5 ; 106.29,0 120.75,0
  silkscreen extent 0.41,-10.37 125.13,10.35, body extent 0.92,-10.11 124.14,10.11, height 7.3
SEGMENT_22LED_V [mm]
  rect 1.8x2.6 hole 1: A(-9.779,11.557) A(-9.779,28.575) A(-9.779,45.593) A(-9.779,62.484) A(-9.779,79.502) A(-9.779,96.52) A(-1.263,3.015) A(-1.263,20.033) A(-1.263,37.051) A(-1.263,53.942) A(-1.263,70.96) A(-1.263,87.978) A(-1.263,104.996) A(7.246,11.524) A(7.246,28.542) A(7.246,45.56) A(7.246,62.451) A(7.246,79.469) A(7.246,96.487) A1(-9.779,113.538) A2(-1.282,122.014) A3(7.246,113.505)
  oval 1.8x2.5 hole 1: K(-7.239,28.575) K(-7.239,45.593) K(-7.239,62.484) K(-7.239,79.502) K(-7.239,96.52) K(-7.239,113.538) K(1.258,122.014) K(1.277,20.033) K(1.277,37.051) K(1.277,53.942) K(1.277,70.96) K(1.277,87.978) K(1.277,104.996) K(9.786,28.542) K(9.786,45.56) K(9.786,62.451) K(9.786,79.469) K(9.786,96.487) K(9.786,113.505) K1(-7.239,11.557) K2(1.277,3.015) K3(9.786,11.524)
  Bottom Layer lines w0.635: -9.779,11.557 -9.779,19.258 -7.239,21.798 -7.239,28.575 ; -9.779,28.575 -9.779,36.276 -7.239,38.816 -7.239,45.593 ; -9.779,45.593 -9.779,53.294 -7.239,55.834 -7.239,62.611 ; -9.779,62.484 -9.779,70.185 -7.239,72.725 -7.239,79.502 ; -9.779,79.502 -9.779,87.203 -7.239,89.743 -7.239,96.52 ; -9.779,96.52 -9.779,104.221 -7.239,106.761 -7.239,113.538 ; -1.263,3.015 -1.263,10.716 1.277,13.256 1.277,20.033 ; -1.263,20.033 -1.263,27.734 1.277,30.274 1.277,37.051 ; -1.263,37.051 -1.263,44.752 1.277,47.292 1.277,54.069 ; -1.263,53.942 -1.263,61.643 1.277,64.183 1.277,70.96 ; -1.263,70.96 -1.263,78.661 1.277,81.201 1.277,87.978 ; -1.263,87.978 -1.263,95.679 1.277,98.219 1.277,104.996 ; -1.263,104.996 -1.263,112.697 1.277,115.237 1.277,122.014 ; 7.246,11.524 7.246,19.225 9.786,21.765 9.786,28.542 ; 7.246,28.542 7.246,36.243 9.786,38.783 9.786,45.56 ; 7.246,45.56 7.246,53.261 9.786,55.801 9.786,62.578 ; 7.246,62.451 7.246,70.152 9.786,72.692 9.786,79.469 ; 7.246,79.469 7.246,87.17 9.786,89.71 9.786,96.487 ; 7.246,96.487 7.246,104.188 9.786,106.728 9.786,113.505
  silkscreen extent -11.12,1.14 11.73,123.86, body extent -10.63,1.42 10.62,123.61, height 7.3
SO8 [mm]
  oval 0.6x1.8 smd: 1(0,0)
  rect 0.6x1.8 smd: 2(1.27,0) 3(2.54,0) 4(3.81,0) 5(3.81,5.715) 6(2.54,5.715) 7(1.27,5.715) 8(0,5.715)
  silkscreen extent -0.6,-1.85 4.4,4.19
SO14 [mm]
  oval 0.6x2.2 smd: 1(0,0)
  rect 0.6x2.2 smd: 2(1.27,0) 3(2.54,0) 4(3.81,0) 5(5.08,0) 6(6.35,0) 7(7.62,0) 8(7.62,5.2) 9(6.35,5.2) 10(5.08,5.2) 11(3.81,5.2) 12(2.54,5.2) 13(1.27,5.2) 14(0,5.2)
  silkscreen extent -0.56,-2.07 8.18,3.7
SO16N [mm]
  oval 0.6x2.2 smd: 1(0,0)
  rect 0.6x2.2 smd: 2(1.27,0) 3(2.54,0) 4(3.81,0) 5(5.08,0) 6(6.35,0) 7(7.62,0) 8(8.89,0) 9(8.89,5.4) 10(7.62,5.4) 11(6.35,5.4) 12(5.08,5.4) 13(3.81,5.4) 14(2.54,5.4) 15(1.27,5.4) 16(0,5.4)
  silkscreen extent -0.57,-2.07 9.5,3.8
SOLDER_SIDE [mm]
  Bottom Layer lines w0.203: 0,1.829 6.325,1.829 6.325,0 0,0 0,1.829
SOT223 [mm]
  rect 1.5x1 smd: 1(0,0) 2(0,2.3) 3(0,4.6)
  rect 1.5x3.3 smd: 2(-6.3,2.3)
  silkscreen extent -4.8,-0.95 1.77,5.55
SOT-23 [mm]
  rect 0.9x0.9 smd: 1(0,0) 2(0,1.9)
  rect 1.2x0.9 smd: 3(-2,0.95)
  silkscreen extent -2.16,-0.51 0.13,2.41
STACKUP_2LAYER [mm]
  Top Layer lines w0.305: 0.165,3.208 0.165,0.16 2.705,0.16 2.705,3.208 0.165,3.208
  Bottom Layer lines w0.305: 3.016,3.203 5.556,3.203 5.556,0.155 3.016,0.155 3.016,3.203
  Keep-Out Layer region: 0.012,3.38 0.012,0.005 5.721,0.005 5.721,3.38
WAGO2X2-5 [mm]
  oval 2.2x3 hole 1.4: 1(0,0) 1(0,5) 2(5,0) 2(5,5)
  silkscreen extent -4,-5.9 9,10

## Part data
C1 C2 C3: library part CAP_EL_SMD, "Kondensator elektrolityczny 2.5x6.3x11"
C1_seg1 C1_seg2 C1_seg3 C1_seg4 C1_seg5 C1_seg6 C1_seg7 C1_seg9 C4 C5 C6 C7: library part CAP
F1: library part FUSE
F8 F9 F10: library part FLUICIDAL, "PCB FLUICIDAL"
H1 H2 H3 H4 H5: library part MOUNTING_HOLE, "Mounting Hole"
LOGO1 LOGO2: library part STACKUP_2LAYER, "STACKUP 2 LAYER"
R1 R1_seg1 R1_seg2 R1_seg3 R1_seg4 R1_seg5 R1_seg6 R1_seg7 R1_seg9 R2 R2_seg1 R2_seg2 R2_seg3 R2_seg4 R2_seg5 R2_seg6 R2_seg7 R2_seg9 R3 R3_seg1 R3_seg2 R3_seg3 R3_seg4 R3_seg5 R3_seg6 R3_seg7 R3_seg9 R4 R4_seg1 R4_seg2 R4_seg3 R4_seg4 R4_seg5 R4_seg6 R4_seg7 R4_seg9 R5_seg1 R5_seg2 R5_seg3 R5_seg4 R5_seg5 R5_seg6 R5_seg7 R5_seg9 R6_seg1 R6_seg2 R6_seg3 R6_seg4 R6_seg5 R6_seg6 R6_seg7 R6_seg9 R7_seg1 R7_seg2 R7_seg3 R7_seg4 R7_seg5 R7_seg6 R7_seg7 R7_seg9 R8_seg1 R8_seg2 R8_seg3 R8_seg4 R8_seg5 R8_seg6 R8_seg7 R8_seg9 R9_seg1 R9_seg2 R9_seg3 R9_seg4 R9_seg5 R9_seg6 R9_seg7 R9_seg9 R10 R11 R12 R13 R14 R15 R16 R17 R18 R19 R20 R21 R22 R23 R24 R25 R26 R27 R28 R29 R30 R31 R32 R33: library part R0805
ST1: "STACKUP 2 LAYER"
U1 U3: library part 74AC08, "Quadruple 2-Input Positive-AND Gate"
U2 U4: library part 74HC4094
U6: "REF"
Z1 Z4: library part IDC10
Z2 Z3 Z5 Z6: library part CON2, "Connector"

## Via types
v1: diameter 1, hole 0.5, Top Layer to Bottom Layer, 198 vias
v2: diameter 0.8, hole 0.4, Top Layer to Bottom Layer, 96 vias

## Nets (pads, with @x,y where several pads share a name; then routed paths per layer and width w, separated by ;. In a path a pad name is that pad's centre, name@x,y a point inside that pad or via, vN(x,y) a via of type N, cw(c..) or ccw(c..) an arc to the next point about the centre after c; other vN are vias at no path point)
DAI: R33.2 U2.2 Z1.9 | length 92
  Top Layer w0.305: v2(154,121.7) 154.721,121.7 155.721,120.7 159.9,120.7 161.6,119 179.5,119 179.9,119.4 v2(180.6,119.4)
  Bottom Layer w0.305: U2.2@106.72,121.6 108.504,121.6 109.3,122.396 110.426,122.396 116.03,128 145.9,128 152.2,121.7 v2(154,121.7) ; v2(180.6,119.4) 181.5,119.4 181.8,119.1 185.74,119.1 Z1.9@187,117.84
  Bottom Layer w0.406: Z1.9@187,117.84 191.51,117.84 R33.2@191.55,117.8
DAO: U1.1 U1.2 U4.9 | length 33
  Top Layer w0.305: v2(77.556,113.944) v2(87.307,113.944)
  Bottom Layer w0.305: U1.2@65.73,121 65.73,119 ; U1.1@67,121 67,119.38 66.62,119 65.73,119 ; v2(77.556,113.944) 67.056,113.944 65.73,115.27 65.73,119 ; v2(87.307,113.944) 87.326,113.964 U4.9@89.371,113.964
DAOQ: R4.2 Z4.9 | length 5.1
  Bottom Layer w0.406: Z4.9@50,117.84 52.54,117.84 52.7,118 R4.2@55.05,118
DCK: R32.2 U1.4 U1.5 U2.3 U4.3 Z1.7 | length 147.9
  Top Layer w0.305: v2(83.5,123) 88.9,123 91.58,120.32 v2(92.438,120.32) ; v2@92.444,120.314 v2@109.157,120.314 ; v2(154,119.5) 159.3,119.5 161,117.8 181.5,117.8 182.8,119.1 185.72,119.1 Z1.7@187,120.38
  Bottom Layer w0.305: U1.5@61.92,121 61.92,122.92 62.5,123.5 74,123.5 74.5,123 v2(83.5,123) ; U1.4@63.19,121 63.19,123.49 ; v2@92.444,120.314 U4.3@94.771,120.314 ; U2.3@106.72,120.33 U2.3@106.856,120.33 ; U2.3@106.84,120.314 U2.3@106.856,120.33 ; v2(154,119.5) 152.81,119.5 145.469,126.841 116.452,126.841 109.941,120.33 U2.3@106.856,120.33
  Bottom Layer w0.406: Z1.7@187,120.38 191.53,120.38 R32.2@191.55,120.4
  other v2: 109.177,120.294
DCKQ: R3.2 Z4.7 | length 5.1
  Bottom Layer w0.406: Z4.7@50,120.38 52.28,120.38 52.4,120.5 R3.2@55.05,120.5
DIM0: U3.1 U4.7 | length 45.9
  Top Layer w0.305: v2(89.9,106.3) 90.6,107 90.6,107.7 91.8,108.9 v2(93.2,108.9)
  Bottom Layer w0.305: U3.1@88.611,96.132 85.827,96.132 85.478,95.783 85.478,91.948 84.589,91.059 82.862,91.059 82.253,91.669 82.253,105.715 82.838,106.3 v2(89.9,106.3) ; v2(93.2,108.9) 93.2,109.5 92.895,109.805 92.895,115.011 93.118,115.234 U4.7@94.771,115.234
DIM1: U3.4 U4.6 | length 21.8
  Top Layer w0.305: v2(90.711,99.949) 90.711,100.857 91.066,101.212 91.669,101.212 92.565,102.108 92.565,106.197 92.336,106.426 v2(92.336,108)
  Bottom Layer w0.305: U3.4@88.611,99.942 v2@90.711,99.942 ; v2(92.336,108) 92.336,115.722 93.118,116.504 U4.6@94.771,116.504
DIM2: U3.9 U4.5 | length 20.9
  Top Layer w0.305: v2(91.498,107.3) 91.498,106.299 91.955,105.842 91.955,103.429 91.683,103.156 v2(91.683,102.482)
  Bottom Layer w0.305: v2(91.498,107.3) 91.498,108.56 91.778,108.839 91.778,110.439 ; v2(91.683,102.482) U3.9@93.811,102.482 ; 91.778,109.541 91.778,110.439 ; U4.5@94.771,117.774 93.219,117.774 91.778,116.332 91.778,110.439
DIM3: U3.12 U4.4 | length 44
  Bottom Layer w0.305: U3.12@93.811,98.672 95.165,98.672 95.361,98.476 95.361,97.991 95.664,97.688 99.804,97.688 100.236,98.12 100.236,108.534 99.372,109.398 94.898,109.398 91.926,106.426 91.174,106.426 90.6,107 90.6,108.55 91.193,109.144 91.193,117.221 93.016,119.044 U4.4@94.771,119.044
EA1: D1_seg1.3 D2_seg1.3 D3_seg1.3 R9_seg1.2 | length 21.1
  Top Layer w0.406: v1(127.797,220.446) v1(127.797,227.304) v1(127.797,234.442)
  Bottom Layer w0.406: R9_seg1.2@124.897,234.409 124.93,234.442 v1(127.797,234.442) D1_seg1.3@127.797,232.909 ; D3_seg1.3@127.797,219.109 v1(127.797,220.446) ; D2_seg1.3@127.797,226.009 v1(127.797,227.304)
EA2: D1_seg2.3 D2_seg2.3 D3_seg2.3 R9_seg2.2 | length 21.1
  Top Layer w0.406: v1(127.797,195.146) v1(127.797,202.004) v1(127.797,209.142)
  Bottom Layer w0.406: R9_seg2.2@124.897,209.109 124.93,209.142 v1(127.797,209.142) D1_seg2.3@127.797,207.609 ; D3_seg2.3@127.797,193.809 v1(127.797,195.146) ; D2_seg2.3@127.797,200.709 v1(127.797,202.004)
EA3: D1_seg3.3 D2_seg3.3 D3_seg3.3 R9_seg3.2 | length 21.1
  Top Layer w0.406: v1(127.797,83.837) v1(127.797,90.695) v1(127.797,97.833)
  Bottom Layer w0.406: R9_seg3.2@124.897,97.8 124.93,97.833 v1(127.797,97.833) D1_seg3.3@127.797,96.3 ; D3_seg3.3@127.797,82.5 v1(127.797,83.837) ; D2_seg3.3@127.797,89.4 v1(127.797,90.695)
EA4: D1_seg4.3 D2_seg4.3 D3_seg4.3 R9_seg4.2 | length 21
  Top Layer w0.406: v1(127.797,58.537) v1(127.797,65.395) v1(127.797,72.533)
  Bottom Layer w0.406: R9_seg4.2@124.93,72.533 v1(127.797,72.533) D1_seg4.3@127.797,71 ; D3_seg4.3@127.797,57.2 v1(127.797,58.537) ; D2_seg4.3@127.797,64.1 v1(127.797,65.395)
EA5: D1_seg5.3 D2_seg5.3 D3_seg5.3 R9_seg5.2 | length 21.1
  Top Layer w0.406: v1(127.797,33.237) v1(127.797,40.095) v1(127.797,47.233)
  Bottom Layer w0.406: R9_seg5.2@124.897,47.2 124.93,47.233 v1(127.797,47.233) D1_seg5.3@127.797,45.7 ; D3_seg5.3@127.797,31.9 v1(127.797,33.237) ; D2_seg5.3@127.797,38.8 v1(127.797,40.095)
EA6: D1_seg6.3 D2_seg6.3 D3_seg6.3 R9_seg6.2 | length 21.1
  Top Layer w0.406: v1(127.797,245.746) v1(127.797,252.604) v1(127.797,259.742)
  Bottom Layer w0.406: R9_seg6.2@124.897,259.709 124.93,259.742 v1(127.797,259.742) D1_seg6.3@127.797,258.209 ; D3_seg6.3@127.797,244.409 v1(127.797,245.746) ; D2_seg6.3@127.797,251.309 v1(127.797,252.604)
EA7: D1_seg7.3 D2_seg7.3 D3_seg7.3 R9_seg7.2 | length 21.1
  Top Layer w0.406: v1(127.797,169.846) v1(127.797,176.704) v1(127.797,183.842)
  Bottom Layer w0.406: R9_seg7.2@124.897,183.809 124.93,183.842 v1(127.797,183.842) D1_seg7.3@127.797,182.309 ; D3_seg7.3@127.797,168.509 v1(127.797,169.846) ; D2_seg7.3@127.797,175.409 v1(127.797,176.704)
EN_SEG_1: R9_seg1.1 U2.11 | length 145.2
  Top Layer w0.406: v2(106.052,132.715) 107.678,134.341 107.678,141.648 111.335,145.306 111.335,150.594 110.345,151.585 110.345,151.607 107.145,154.807 v2(107.145,160.401)
  Bottom Layer w0.406: U2.11@101.32,116.52 98.803,116.52 97.874,117.45 97.874,128.374 101.656,132.156 105.494,132.156 v2(106.052,132.715) ; v2(107.145,160.401) 107.145,161.045 108.745,162.645 108.745,184.17 107.4,185.515 107.4,231.209 110.6,234.409 R9_seg1.1@122.947,234.409
EN_SEG_2: R9_seg2.1 U2.12 | length 115
  Top Layer w0.406: v2(107.119,132.156) 108.338,133.375 108.338,141.375 111.995,145.032 111.995,150.868 111.005,151.858 111.005,151.88 107.932,154.954 107.932,160.045 v2(108.618,160.731) ; v2(109.862,202.514) 109.862,203.581 v2(110.871,204.59)
  Bottom Layer w0.406: U2.12@101.32,117.79 99.286,117.79 98.636,118.44 98.636,128.202 101.828,131.394 106.357,131.394 v2(107.119,132.156) ; v2(108.618,160.731) 109.862,161.976 v2(109.862,202.514) ; v2(110.871,204.59) 112.631,206.35 112.631,207.9 113.84,209.109 R9_seg2.1@122.947,209.109
EN_SEG_3: R9_seg3.1 U2.13 | length 40.5
  Top Layer w0.406: v2(110.599,97.809) 110.608,97.8 v2(113.393,97.8)
  Bottom Layer w0.305: U2.13@101.32,119.06 102.816,119.06 103.03,118.847 103.03,112.57 104.1,111.5 107.7,111.5 109.2,110 109.2,99.786 110.59,98.396 v2@110.59,97.818 ; v2@110.608,97.8 v2(110.599,97.809) ; v2@110.59,97.818 110.59,97.8 v2(110.599,97.809) ; v2@110.59,97.818 v2(110.599,97.809)
  Bottom Layer w0.406: v2@110.59,97.8 v2@110.608,97.8 ; v2(113.393,97.8) R9_seg3.1@122.947,97.8
EN_SEG_4: R9_seg4.1 U2.14 | length 65.8
  Bottom Layer w0.305: U2.14@101.32,120.33 103.172,120.33 103.614,119.888 103.614,112.886 104.441,112.059 107.931,112.059 109.759,110.231 109.8,110.19 109.8,100.074 111.488,98.386 111.488,73.857 112.845,72.5 R9_seg4.1@122.947,72.5
EN_SEG_5: R9_seg5.1 U2.7 | length 82.6
  Top Layer w0.406: v2@112.529,70.936 v2(112.529,74.136) ; v2(112.555,54.886) v2(112.555,58.186) ; v2(114.6,47.2) v2(120.1,47.2)
  Bottom Layer w0.305: U2.7@106.72,115.25 108.7,115.25 ; 109.45,115.25 108.7,115.25 ; v2(112.529,74.136) 112.529,75.086 112.1,75.515 112.1,98.586 111.387,99.298 110.4,100.286 110.4,114.5 109.65,115.25 108.7,115.25
  Bottom Layer w0.406: v2(112.555,54.886) 112.555,48.631 113.986,47.2 v2(114.6,47.2) ; v2(112.555,58.186) v2(112.555,70.911) v2@112.555,71.011 ; v2(120.1,47.2) R9_seg5.1@122.947,47.2
EN_SEG_6: R9_seg6.1 U2.6 | length 163.5
  Top Layer w0.406: v2(104.655,130.48) 104.655,133.071 107.018,135.433 107.018,141.922 110.675,145.579 110.675,150.321 109.685,151.311 109.685,151.333 106.129,154.889 106.129,161.2 106.5,161.571 v2(106.5,163.3)
  Bottom Layer w0.305: 104.655,125.628 104.655,124.308 104.173,123.825 104.173,117.323 104.975,116.52 U2.6@106.72,116.52
  Bottom Layer w0.406: 104.655,125.628 v2(104.655,130.48) ; v2(106.5,163.3) 106.5,164.5 106.7,164.7 106.7,254.9 111.509,259.709 R9_seg6.1@122.947,259.709
EN_SEG_7: R9_seg7.1 U2.5 | length 84.3
  Top Layer w0.406: v2(108.364,131.674) 108.999,132.309 108.999,141.101 112.656,144.758 112.656,146.8 112.656,151.142 111.666,152.132 111.666,152.154 108.719,155.1 108.719,159.309 110.828,161.417 110.828,167.234 v2(111.666,168.072)
  Bottom Layer w0.305: U2.5@106.72,117.79 105.128,117.79 104.732,118.186 104.732,123.317 105.519,124.104 105.519,128.829 v2(108.364,131.674)
  Bottom Layer w0.406: v2(111.666,168.072) 112.199,168.605 112.199,182.88 113.128,183.809 R9_seg7.1@122.947,183.809
EN_SEG_DP1: R15.1 U2.4 | length 17.9
  Bottom Layer w0.305: U2.4@106.72,119.06 109.44,119.06 109.56,119.06 110.718,120.218 111.286,120.786 119.9,120.786 ; 118.9,120.786 119.9,120.786 ; R15.1@122.917,120.786 119.9,120.786
EN_SEG_DP2: R9_seg9.1 U4.11 | length 49.6
  Top Layer w0.305: v2(90.387,110.49) v2(93.733,110.49) ; v2(101.7,111.2) 107.6,117.1 108.9,117.1 111.1,119.3 111.1,120.3 v2(112.4,121.6)
  Bottom Layer w0.305: U4.11@89.371,116.504 87.754,116.504 86.164,114.914 86.164,112.751 88.425,110.49 v2(90.387,110.49) ; v2(93.733,110.49) 100.99,110.49 v2(101.7,111.2) ; v2(112.4,121.6) 113.9,123.1 R9_seg9.1@122.947,123.1
GND: C1.1 C1_seg1.2 C1_seg2.2 C1_seg3.2 C1_seg4.2 C1_seg5.2 C1_seg6.2 C1_seg7.2 C1_seg9.2 C2.1 C3.1 C4.2 C5.2 C6.2 C7.2 R3_seg1.2 R3_seg2.2 R3_seg3.2 R3_seg4.2 R3_seg5.2 R3_seg6.2 R3_seg7.2 R3_seg9.2 R4_seg1.2 R4_seg2.2 R4_seg3.2 R4_seg4.2 R4_seg5.2 R4_seg6.2 R4_seg7.2 R4_seg9.2 R5_seg1.2 R5_seg2.2 R5_seg3.2 R5_seg4.2 R5_seg5.2 R5_seg6.2 R5_seg7.2 R5_seg9.2 R19.2 R26.2 R29.1 R30.1 R31.1 R32.1 R33.1 U1.7 U1_seg1.11 U1_seg2.11 U1_seg3.11 U1_seg4.11 U1_seg5.11 U1_seg6.11 U1_seg7.11 U1_seg9.11 U2.8 U3.7 U4.8 U6.2 U6.3 U6.6 U6.7 Z1.2 Z1.10 Z2.2 Z3.2 Z4.2 Z4.10 Z5.1 Z6.1 | length 117.2
  Top Layer w0.406: v1(114.947,60.821) 118.658,57.11 v1(125.578,57.11)
  Bottom Layer w0.406: U1_seg5.11@123.747,31.81 v1(125.578,31.81) ; U1_seg4.11@123.747,57.11 v1(125.578,57.11) ; U1_seg3.11@123.747,82.41 v1(125.578,82.41) ; U1_seg9.11@123.747,107.71 v1(125.578,107.71) ; U1_seg7.11@123.747,168.419 v1(125.578,168.419) ; U1_seg2.11@123.747,193.719 v1(125.578,193.719) ; U1_seg1.11@123.747,219.019 v1(125.578,219.019) ; U1_seg6.11@123.747,244.319 v1(125.578,244.319)
  Bottom Layer w0.508: v1(59.38,118.92) U1.7@59.38,121 ; C4.2@71.25,126.2 v1(72.95,126.2) ; U6.2@88.309,91.815 v1@90.535,91.815 ; U6.3@88.309,93.085 v1@90.51,93.085 ; U3.7@88.611,103.752 v1@90.663,103.752 ; v1@91.768,91.815 U6.7@94.024,91.815 ; v1@91.793,93.085 U6.6@94.024,93.085 ; U4.8@94.771,113.964 v1(96.889,113.964) ; C7.2@98.359,96.145 100.115,96.145 v1(100.134,96.164) ; U2.8@106.72,113.98 v1(108.838,113.98)
  Bottom Layer w0.635: v1(83.809,92.064) R19.2@83.809,93.695 ; v1(87.719,126.776) C6.2@89.401,126.776 ; v1@90.663,103.752 v1(90.783,103.632) ; R26.2@98.359,106.045 v1(98.359,107.677) ; v1(99.659,126.993) C5.2@101.351,126.993 ; v1@112.517,101.583 R29.1@112.517,103.286 ; C1_seg5.2@114.947,33.75 v1(114.947,35.521) ; C1_seg4.2@114.947,59.05 v1(114.947,60.821) ; C1_seg3.2@114.947,84.35 v1(114.947,86.121) ; C1_seg9.2@114.947,109.65 v1(114.947,111.421) ; C1_seg7.2@114.947,170.359 v1(114.947,172.13) ; C1_seg2.2@114.947,195.659 v1(114.947,197.43) ; C1_seg1.2@114.947,220.959 v1(114.947,222.73) ; C1_seg6.2@114.947,246.259 v1(114.947,248.03) ; R5_seg5.2@145.077,33 v1(145.077,34.97) ; v1(145.077,37.63) R4_seg5.2@145.077,39.5 ; R3_seg5.2@145.077,46.7 145.077,48.73 ; R5_seg4.2@145.077,58.3 145.077,60.27 ; v1(145.077,62.93) R4_seg4.2@145.077,64.8 ; R3_seg4.2@145.077,72 v1(145.077,74.03) ; R5_seg3.2@145.077,83.6 v1(145.077,85.57) ; v1(145.077,88.23) R4_seg3.2@145.077,90.1 ; R3_seg3.2@145.077,97.3 v1(145.077,99.33) ; R5_seg9.2@145.077,108.9 v1(145.077,110.87) ; v1(145.077,113.53) R4_seg9.2@145.077,115.4 ; R3_seg9.2@145.077,122.6 v1(145.077,124.63) ; R5_seg7.2@145.077,169.609 v1(145.077,171.579) ; v1(145.077,174.239) R4_seg7.2@145.077,176.109 ; R3_seg7.2@145.077,183.309 v1(145.077,185.339) ; R5_seg2.2@145.077,194.909 v1(145.077,196.879) ; v1(145.077,199.539) R4_seg2.2@145.077,201.409 ; R3_seg2.2@145.077,208.609 v1(145.077,210.639) ; R5_seg1.2@145.077,220.209 v1(145.077,222.179) ; v1(145.077,224.839) R4_seg1.2@145.077,226.709 ; R3_seg1.2@145.077,233.909 v1(145.077,235.939) ; R5_seg6.2@145.077,245.509 v1(145.077,247.479) ; v1(145.077,250.139) R4_seg6.2@145.077,252.009 ; R3_seg6.2@145.077,259.209 v1(145.077,261.239)
  other v1: 191.1,2 207,6 41.1,7 148.8,8.3 43.7,16.2 202.5,16.8 143.6,17.1 190.1,23.9 33.5,25.4 169.4,25.4 23.2,33.1 161.5,33.8 116,38.3 113.6,41.1 119.3,41.1 138.8,66.4 116.6,66.5 148.2,66.6 120,69.6 114.8,70.4 129.3,75.3 139.3,75.3 115.7,75.6 149,76.6 149,83.2 103.5,91.6 119.3,91.7 90.58,91.77 91.748,91.796 91.748,93.04 90.529,93.066 115.2,94.7 197.6,98.6 116.8,99.5 104.7,100.7 112.504,101.57 147.5,102.6 89.3,108.7 48.5,109.3 77.1,111.5 99.1,111.9 199.5,111.9 88.8,112.4 113.7,113.8 217.7,114.8 55.9,115.1 83.9,117 117.4,118.6 62.3,118.8 85.6,119.1 79.6,120.7 69.7,121.8 181.4,121.9 181.4,123.8 42.1,124.6 117.7,124.8 205.7,125 153.2,125.4 181.361,125.623 95.7,126.9 109.5,127.9 42.2,128.8 101.9,129.7 152.4,130.1 48.5,130.5 148.8,132.6 161.8,135.6 169.9,135.8 24.8,135.9 34,136.1 102.5,143.1 116.8,144.5 151.6,144.5 41.4,144.6 164.3,149 149.5,151.8 101.6,152.3 42.5,152.4 117.1,152.5 185.9,152.9 174.8,154.8 194.5,159.5 33.5,160.8 160.7,160.9 169.2,161.2 25.5,161.8 114.4,162.5 142.6,163 205.7,175.8 117.8,176.5 115.7,180.6 187.7,183.6 140.7,187 113.8,187.6 119.2,202 115.6,205.3 114.2,226.5 119.3,230 113,231.3 110.1,248.9 119.2,253.7 113,256.6 23.7,272.4 34.5,272.6 153.1,279.4 42.7,280 43.5,288.5 151.8,288.7
K11: R1_seg1.2 SEG-A.K3 | length 49.7
  Bottom Layer w0.635: R1_seg1.2@145.077,231.306 147.823,231.306 151.522,235.004 151.522,272.178 149.75,273.95 SEG-A.K3@149.75,276
K12: R1_seg2.2 SEG-B.K1 | length 58.6
  Bottom Layer w0.635: R1_seg2.2@145.077,206.009 150.64,206.009 152.153,204.495 152.153,164.694 155.608,161.239 157.03,161.239 158.261,162.47 SEG-B.K1@158.261,165.557
K13: R1_seg3.2 SEG-C.K1 | length 78.6
  Bottom Layer w0.635: R1_seg3.2@145.077,94.7 148,94.7 148.9,93.8 148.9,91.9 153.165,87.635 153.165,29.104 155.153,27.117 157.578,27.117 158.261,27.8 SEG-C.K1@158.261,29.557
K14: R1_seg4.2 SEG-D.K3 | length 80.8
  Bottom Layer w0.635: R1_seg4.2@145.077,69.4 149.1,69.4 150.4,68.1 150.4,28 160.662,17.738 160.662,11.455 153.207,4 SEG-D.K3@149.75,4
K15: R1_seg5.2 SEG-E.K1 | length 157.1
  Bottom Layer w0.635: SEG-E.K1@22.261,29.557 22.261,23.009 27.668,17.602 32.443,17.602 38.941,24.1 144.7,24.1 147.7,27.1 147.7,43 146.6,44.1 R1_seg5.2@145.077,44.1
K16: R1_seg6.2 SEG-F.K1 | length 209
  Bottom Layer w0.635: SEG-F.K1@22.261,165.557 22.261,159.077 27.287,154.051 32.651,154.051 64.533,185.933 ; 63.7,185.1 64.533,185.933 ; R1_seg6.2@145.077,256.609 147.509,256.609 148,257.1 148,261.8 146.6,263.2 107.857,263.2 91.9,247.243 91.9,213.3 64.533,185.933
K17: R1_seg7.2 SEG-G.K3 | length 55.9
  Bottom Layer w0.635: R1_seg7.2@145.077,180.709 148.66,180.709 149.436,179.934 149.436,163.576 160.612,152.4 160.612,147.218 153.393,140 SEG-G.K3@149.75,140
K21: SEG-A.K2 T2_seg1.2 | length 87.7
  Bottom Layer w0.635: T2_seg1.2@131.847,224.406 T2_seg1.2@138.151,224.406 ; T2_seg1.2@131.847,224.409 T2_seg1.2@138.147,224.409 T2_seg1.2@138.151,224.406 ; SEG-A.K2@158.29,284.5 158.29,278.26 152.411,272.381 152.411,228.68 147.2,223.469 144.508,223.469 143.571,224.406 T2_seg1.2@138.151,224.406
K22: SEG-B.K2 T2_seg2.2 | length 75.5
  Bottom Layer w0.635: T2_seg2.2@131.847,199.109 T2_seg2.2@138.147,199.109 140.547,199.109 141.485,198.171 149.867,198.171 151.264,196.774 151.264,164.313 161.831,153.746 165.933,153.746 166.777,154.59 SEG-B.K2@166.777,157.015
K23: SEG-C.K2 T2_seg3.2 | length 100.3
  Bottom Layer w0.635: T2_seg3.2@131.847,87.8 T2_seg3.2@138.147,87.8 140.7,87.8 141.7,86.8 149.9,86.8 152.2,84.5 152.2,28.8 153.751,27.249 163.804,17.196 166.022,17.196 166.777,17.951 SEG-C.K2@166.777,21.015 SEG-C.K2@166.835,20.957
K24: SEG-D.K2 T2_seg4.2 | length 69.9
  Bottom Layer w0.635: T2_seg4.2@131.847,62.5 T2_seg4.2@138.147,62.5 141.844,62.5 142.857,61.487 148.213,61.487 149.5,60.2 149.5,27.6 158.29,18.81 SEG-D.K2@158.29,12.5
K25: SEG-E.K2 T2_seg5.2 | length 142
  Bottom Layer w0.635: SEG-E.K2@30.777,21.015 34.459,21.015 38.444,25 144.3,25 146.8,27.5 146.8,34.8 145.259,36.341 140.967,36.341 140.108,37.2 T2_seg5.2@138.147,37.2 T2_seg5.2@131.847,37.2
K26: SEG-F.K2 T2_seg6.2 | length 213.2
  Bottom Layer w0.635: SEG-F.K2@30.777,157.015 34.215,157.015 91.011,213.811 91.011,247.611 107.5,264.1 147,264.1 148.9,262.2 148.9,250 147.699,248.799 142.11,248.799 141.201,249.709 T2_seg6.2@138.147,249.709 T2_seg6.2@131.847,249.709
K27: SEG-G.K2 T2_seg7.2 | length 45
  Bottom Layer w0.635: T2_seg7.2@131.847,173.809 T2_seg7.2@138.147,173.809 140.752,173.809 141.536,173.025 147.48,173.025 148.547,171.958 148.547,163.182 158.29,153.439 SEG-G.K2@158.29,148.5
K31: R2_seg1.2 SEG-A.K1 | length 93
  Bottom Layer w0.635: R2_seg1.2@145.077,217.506 148.095,217.506 153.3,222.711 153.3,272.012 161.399,280.111 161.399,288.569 156.968,293 SEG-A.K1@149.79,293
K32: R2_seg2.2 SEG-B.K3 | length 69.7
  Bottom Layer w0.635: R2_seg2.2@145.077,192.209 149.022,192.209 150.325,190.906 150.325,163.957 161.424,152.857 166.301,152.857 175.286,161.842 SEG-B.K3@175.286,165.524
K33: R2_seg3.2 SEG-C.K3 | length 94.9
  Bottom Layer w0.635: R2_seg3.2@145.077,80.9 149.7,80.9 151.3,79.3 151.3,28.4 163.419,16.281 166.454,16.281 175.286,25.114 SEG-C.K3@175.286,29.524
K34: R2_seg4.2 SEG-D.K1 | length 38.1
  Bottom Layer w0.635: R2_seg4.2@145.077,55.6 146.814,55.6 147.7,55.6 148.6,54.7 148.6,27.2 149.79,26.01 149.79,25.91 SEG-D.K1@149.79,21
K35: R2_seg5.2 SEG-E.K3 | length 112.7
  Bottom Layer w0.635: SEG-E.K3@39.286,29.524 39.286,26.614 40.011,25.889 143.789,25.889 145.077,27.177 R2_seg5.2@145.077,30.3
K36: R2_seg6.2 SEG-F.K3 | length 195.8
  Bottom Layer w0.635: SEG-F.K3@39.286,165.524 41.224,165.524 62.488,186.788 90.122,214.422 90.122,248.022 107.1,265 147.4,265 149.8,262.6 149.8,244.7 147.909,242.809 R2_seg6.2@145.077,242.809
K37: R2_seg7.2 SEG-G.K1 | length 13.2
  Bottom Layer w0.635: R2_seg7.2@145.077,166.909 146.992,166.909 147.658,166.243 147.658,162.814 149.79,160.682 SEG-G.K1@149.79,157 SEG-G.K1@149.969,157.179
LAT: R31.2 U1.12 U1.13 U2.1 U4.1 Z1.3 | length 157.9
  Top Layer w0.305: v2(84.3,123.868) v2@96.832,123.868 ; v2(96.832,123.876) v2(108.75,123.876) ; v2(154,122.8) 154.6,122.8 156.1,121.3 160.2,121.3 161.9,119.6 177.6,119.6 179.6,121.6 179.6,125.9 183,129.3 188.185,129.3 188.985,128.5 188.985,126 188.445,125.46 Z1.3@187,125.46
  Bottom Layer w0.305: U1.12@64.46,126.2 64.46,124.34 64.7,124.1 65.7,124.1 ; U1.13@65.73,126.2 65.73,124.13 65.7,124.1 ; v2(84.3,123.868) 74.532,123.868 74.3,124.1 65.7,124.1 ; U4.1@94.771,122.854 96.452,122.854 96.84,123.242 v2@96.84,123.868 ; 108.348,122.87 U2.1@106.72,122.87 108.5,122.87 108.75,123.12 v2(108.75,123.876) 111.076,123.876 115.759,128.559 146.141,128.559 151.9,122.8 v2(154,122.8)
  Bottom Layer w0.406: Z1.3@187,125.46 191.49,125.46 R31.2@191.55,125.4
LATQ: R2.2 Z4.3 | length 5.1
  Bottom Layer w0.406: Z4.3@50,125.46 55.01,125.46 R2.2@55.05,125.5